# Altium PCB PCB2.PcbDoc
Units mm, origin at the board's own origin, x right, y up, seen from the top; angles counter-clockwise.
Board outline 82.55 x 50.29 mm, 2 copper layers (Top Layer, Bottom Layer); 31 components, 23 nets, 83 pads, 28 vias.
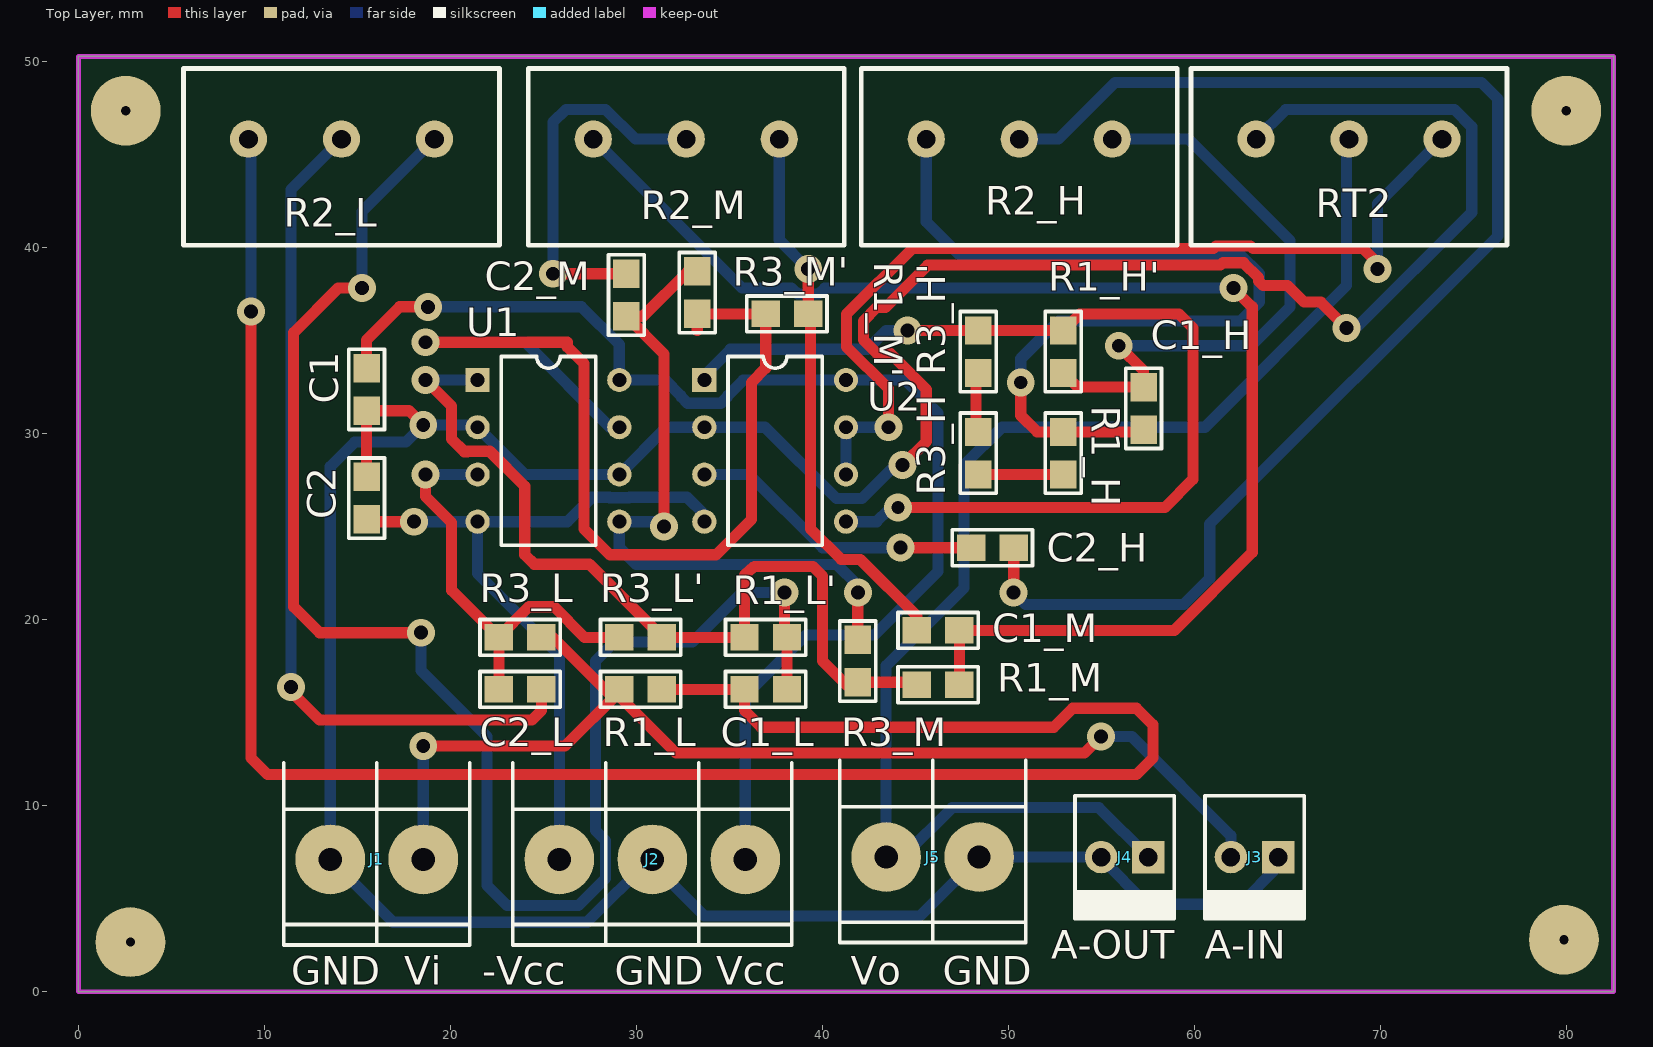
[diagram p0: Top Layer view]
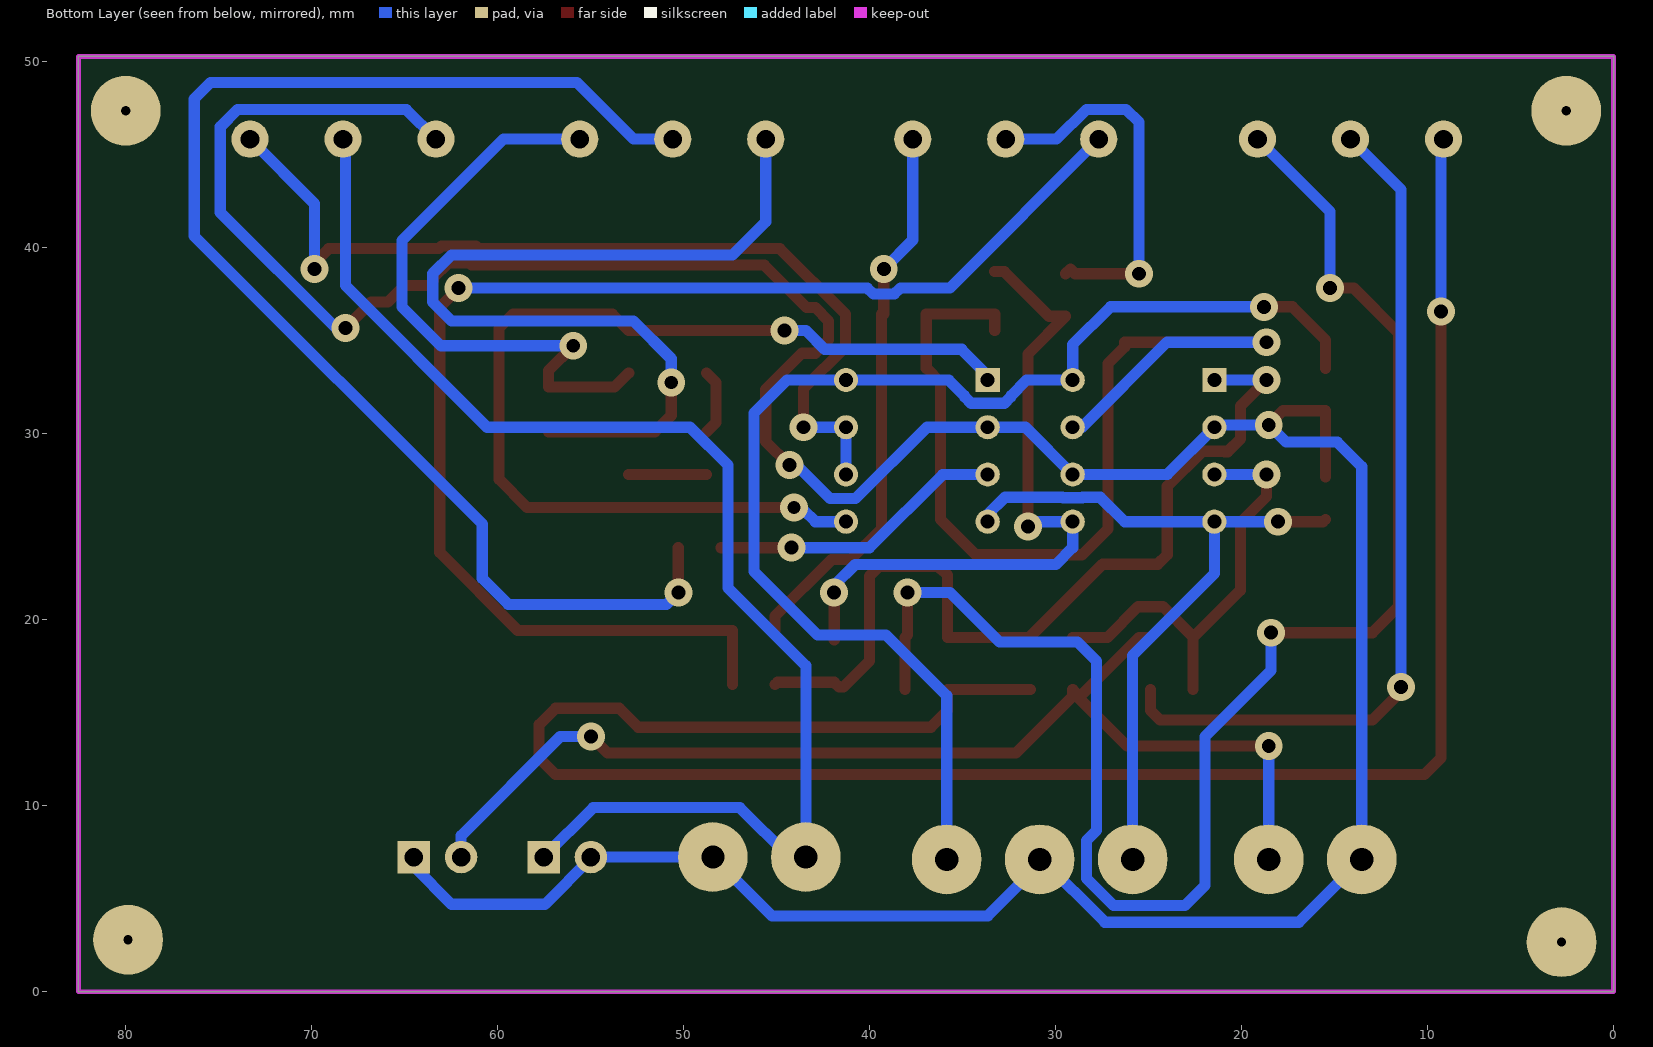
[diagram p1: Bottom Layer view, seen from below]
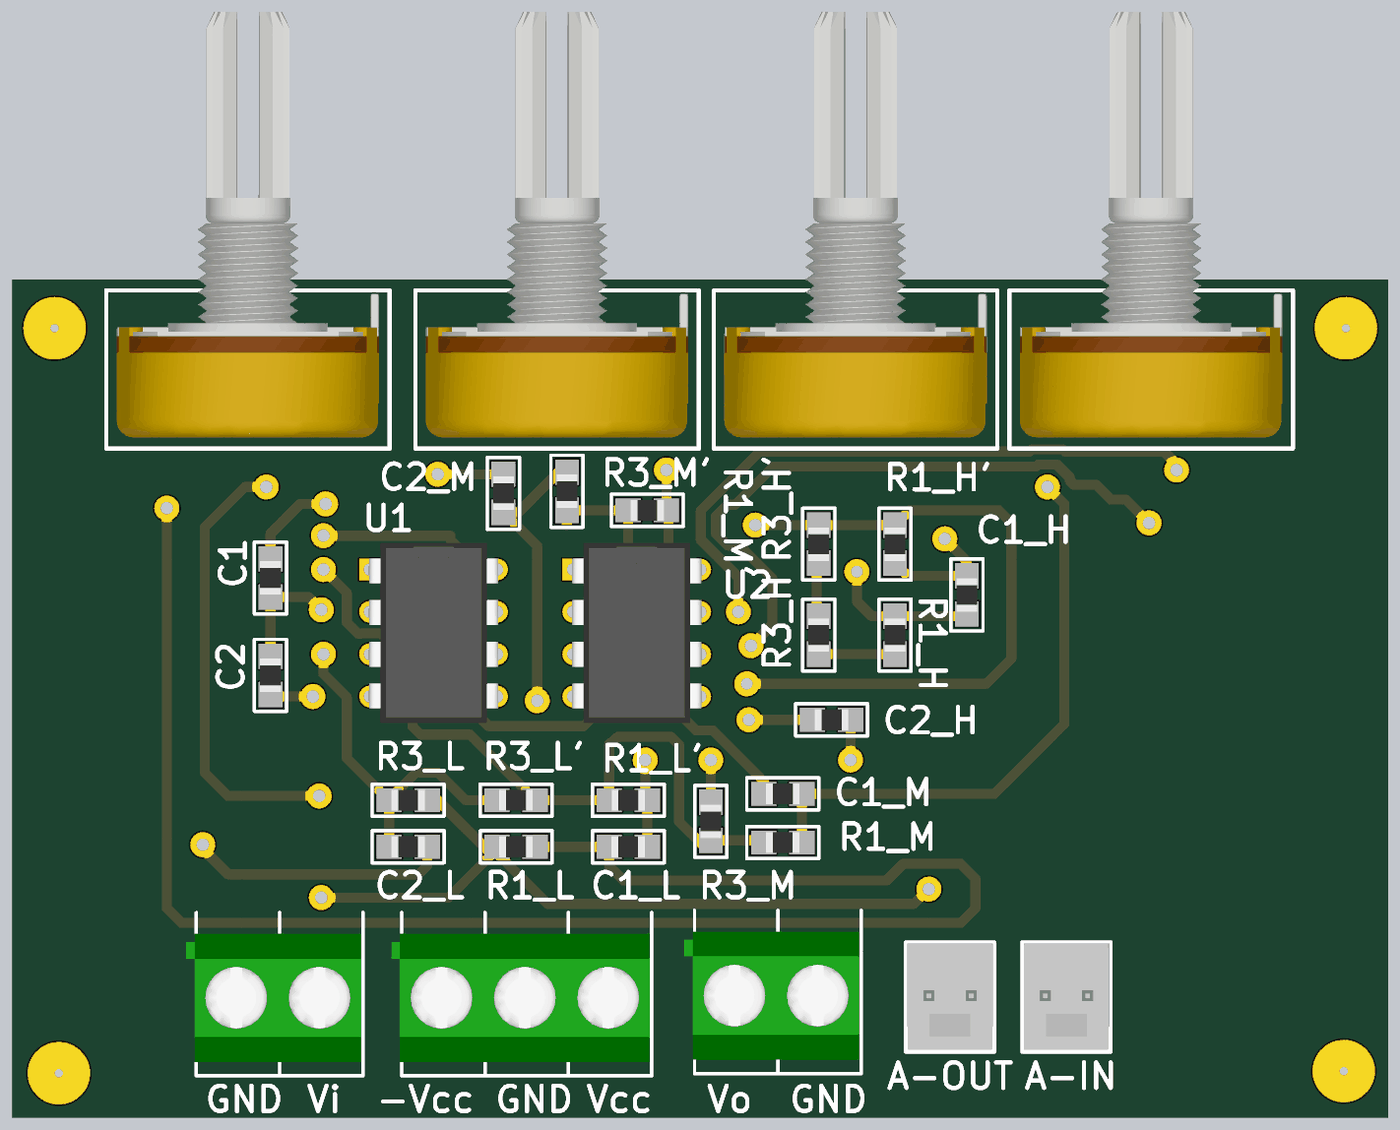
[diagram p2: 3D render of the assembled board from above, using the file's embedded part models]

## Layer stack, top to bottom
Top Solder: solder mask 0.0102, Solder Resist, Dk 3.5
Top Layer: signal copper 0.0356
Dielectric 1: dielectric 0.32, FR-4, Dk 4.8
Bottom Layer: signal copper 0.0356
Bottom Solder: solder mask 0.0102, Solder Resist, Dk 3.5

## Board outline
0,0 0,50.292 82.55,50.292 82.55,0

## Design rules (kind name [scope] priority, off if disabled: settings)
Clearance [All] p1: gap=0.3 ignorepadtopadclearanceinfootprint=FALSE
PolygonConnect [All] p1: connectstyle=Relief reliefconductorwidth=0.254 reliefentries=4 polygonreliefangle="90 Angle" airgapwidth=0.254
RoutingVias [All] p1: holewidth=0.7 width=2 viastyle="Through Hole" minholewidth=0.7 minwidth=2 maxholewidth=0.7 maxwidth=2
SolderMaskExpansion [All] p1: expansion=0.102
Width [All] p1: maxlimit=0.6 minlimit=0.6 preferedwidth=0.6
30 further rules are at their usual default settings.

## Components (designator, comment, footprint, x,y, rotation, side; value= is the part's Value field where it differs from the comment)
C1 "100n" 0805 15.494,32.385 r270 top
C1_H "56" 0805 57.277,31.369 r90 top
C1_L "68n" 0805 36.957,16.256 r0 top
C1_M "47n" 0805 46.228,19.431 r180 top
C2 "100n" 0805 15.494,26.543 r90 top
C2_H "5.6n" 0805 49.149,23.876 r180 top
C2_L "6.8n" 0805 23.749,16.256 r180 top
C2_M "4.7n" 0805 29.464,37.465 r270 top
J1 "IN" BORNERA2 16.042,7.112 r90 top
J2 "VCC" BORNERA3 30.861,7.112 r90 top
J3 "MOLEX2" MOLEX2 64.516,7.239 r180 top
J4 "MOLEX2" MOLEX2 57.531,7.239 r180 top
J5 "OUT" BORNERA2 45.934,7.239 r90 top
R1_H "100" 0805 52.959,28.956 r90 top
R1_H' "100" 0805 52.959,34.417 r90 top
R1_L "10k" 0805 30.226,16.256 r0 top
R1_L' "10k" 0805 36.957,19.05 r180 top
R1_M "1k" 0805 46.228,16.51 r0 top
R1_M' "1k" 0805 38.1,36.449 r180 top
R2_H "1k" POTENCIOMETRO 50.593,45.847 r180 top
R2_L "100k" POTENCIOMETRO 14.144,45.847 r180 top
R2_M "10k" POTENCIOMETRO 32.686,45.847 r180 top
R3_H "10k" 0805 48.387,28.956 r90 top
R3_H' "10k" 0805 48.387,34.417 r90 top
R3_L "1M" 0805 23.749,19.05 r180 top
R3_L' "1M" 0805 30.226,19.05 r0 top
R3_M "100k" 0805 41.91,17.78 r90 top
R3_M' "100k" 0805 33.274,37.592 r270 top
RT2 "100k" POTENCIOMETRO 68.326,45.847 r180 top
U1 "LM833" DIP8 21.463,32.893 r0 top
U2 "LM833" DIP8 33.655,32.893 r0 top

## Footprints (in the part's own frame and the unit in brackets; to place one, negate y for a bottom-side part, rotate by r counter-clockwise, add the part's x,y. Pads: shape width x height; smd on the part's side, far side on the other; paste and mask are expansions set on the pad)
0805 [mil] "Pasivo 0805"
  rect 60x56 smd: 1(-45,0) 2(45,0)
  silkscreen extent -85,-38 85,38, body extent -40,-25 39,25, height 15
BORNERA2 [mm] "Bornera con Tornillos 5mm separación"
  round 3.75 hole 1.25: 1(0,2.5) 2(0,-2.5)
  silkscreen extent -4.6,-5 5.2,5, body extent -3.76,-4.89 3.94,5.61, height 10
BORNERA3 [mm] "Bornera con Tornillos 5mm separación"
  round 3.75 hole 1.25: 1(0,5) 2(0,0) 3(0,-5)
  silkscreen extent -4.6,-7.5 5.2,7.5, body extent -3.76,-7.39 3.94,8.11, height 10.05
DIP8 [mm]
  rect 1.3x1.3 hole 0.75: 1(0,0)
  round 1.3 hole 0.75: 2(0,-2.54) 3(0,-5.08) 4(0,-7.62) 5(7.62,-7.62) 6(7.62,-5.08) 7(7.62,-2.54) 8(7.62,0)
  silkscreen extent 1.27,-8.89 6.35,1.27, body extent -0.06,-9.21 7.7,1.59, height 4.5
MOLEX2 [mm]
  rect 1.75x1.75 hole 1: 1(0,0)
  round 1.75 hole 1: 2(2.54,0)
  silkscreen extent -1.4,-3.3 3.94,3.3, body extent -1.27,-3.17 3.81,3.18, height 10.74
POTENCIOMETRO [mm]
  round 2 hole 1: 1(-5,0) 2(0,0) 3(5,0)
  silkscreen extent -8.5,-3.8 8.5,5.7, body extent -7.87,-20.53 7.87,5.03, height 20.12

## Part data
C1 C1_H C1_L C1_M C2 C2_H C2_L C2_M: library part CAP
J1 J5: library part "BORNERA 2"
J2: library part "BORNERA 3"
R1_H R1_H' R1_L R1_L' R1_M R1_M' R3_H R3_H' R3_L R3_L' R3_M R3_M': library part RES
R2_H R2_L R2_M RT2: library part POTENCIOMETRO
U1 U2: "Dual Audio Operational Amplifier"

## Free pads (board coordinates)
  round 3.75 hole 0.5: 2(2.54,47.371) 4(2.794,2.667) 5(80.01,47.371) 6(79.883,2.794)

## Via types
v1: diameter 1.5, hole 0.75, Top Layer to Bottom Layer, 26 vias
v2: diameter 1.5, hole 0.711, Top Layer to Bottom Layer, 1 vias
v3: diameter 1.5, hole 0.7, Top Layer to Bottom Layer, 1 vias

## Nets (pads, with @x,y where several pads share a name; then routed paths per layer and width w, separated by ;. In a path a pad name is that pad's centre, name@x,y a point inside that pad or via, vN(x,y) a via of type N, cw(c..) or ccw(c..) an arc to the next point about the centre after c; other vN are vias at no path point)
-VCC: C2.1 J2.1 U1.4 U2.4 | length 39.6
  Top Layer w0.6: C2.1 15.621,25.273 v1(18.034,25.273)
  Bottom Layer w0.6: v1(18.034,25.273) 21.209,25.273 21.336,25.4 U1.4 ; J2.1 25.861,18.081 21.463,22.479 U1.4 ; U2.4 33.655,25.654 32.721,26.588 29.626,26.588 29.601,26.563 28.565,26.563 28.54,26.588 27.604,26.588 26.289,25.273 U1.4
GND: C1.2 C2.2 J1.1 J2.2 J3.1 J4.2 J5.2 RT2.3 U1.2 U1.6 U2.2 | length 188.7
  Top Layer w0.6: C2.2 C1.2 17.78,31.242 v1(18.542,30.48) ; v1(44.323,28.321) 45.593,29.591 45.593,32.385 43.643,34.335 42.927,34.335 42.209,35.053 42.209,36.067 42.927,36.785 43.389,36.785 45.675,39.071 61.419,39.071 61.544,39.196 62.662,39.196 63.453,38.405 63.453,38.228 63.708,37.973 65.024,37.973 65.913,37.084 66.802,37.084 v1(68.199,35.687)
  Bottom Layer w0.6: v1(44.323,28.321) 43.942,28.321 42.144,26.523 40.757,26.523 36.927,30.353 U2.2 31.623,30.353 U1.6 24.003,27.813 U1.2 21.336,30.48 v1(18.542,30.48) 17.62,29.558 14.859,29.558 13.542,28.241 J1.1 16.917,3.737 27.359,3.737 30.734,7.112 J2.2 30.861,6.858 33.655,4.064 45.259,4.064 J5.2 J4.2 54.991,7.18 57.472,4.699 62.484,4.699 64.516,6.731 J3.1 ; RT2.3 64.926,47.447 73.989,47.447 74.926,46.51 74.926,41.906 68.707,35.687 v1(68.199,35.687)
NetC1_H_1: C1_H.1 R1_H.2 R2_H.3 | length 49.1
  Top Layer w0.6: v2(50.673,32.766) 50.673,30.988 51.562,30.099 R1_H.2 C1_H.1@57.277,30.099
  Bottom Layer w0.6: R2_H.3 45.593,41.402 47.371,39.624 62.484,39.624 63.5,38.608 63.5,37.084 62.484,36.068 52.705,36.068 50.673,34.036 v2(50.673,32.766)
NetC1_H_2: C1_H.2 R1_H'.1 R2_H.1 | length 32.9
  Top Layer w0.6: R1_H'.1 53.721,32.512 C1_H.2 57.277,33.401 v1(55.944,34.734)
  Bottom Layer w0.6: R2_H.1 59.69,45.847 65.151,40.386 65.151,36.83 63.055,34.734 v1(55.944,34.734)
NetC1_L_1: C1_L.1 R1_L.2 R2_L.3 | length 113.1
  Top Layer w0.6: v1(9.271,36.576) 9.271,12.573 10.16,11.684 56.896,11.684 57.785,12.573 57.785,14.351 56.896,15.24 53.467,15.24 52.451,14.224 36.703,14.224 35.814,15.113 C1_L.1 R1_L.2
  Bottom Layer w0.6: R2_L.3 9.271,45.72 v1(9.271,36.576)
NetC1_L_2: C1_L.2 R1_L'.1 R2_L.1 | length 87.8
  Top Layer w0.6: v1(15.24,37.846) 13.97,37.846 11.557,35.433 11.557,20.701 12.954,19.304 v1(18.415,19.304) ; v1(37.973,21.463) 37.973,19.177 R1_L'.1 C1_L.2
  Bottom Layer w0.6: v1(15.24,37.846) 15.24,41.943 R2_L.1 ; v1(18.415,19.304) 18.415,17.272 21.971,13.716 21.971,5.715 23.049,4.637 26.886,4.637 28.336,6.087 28.336,8.137 27.813,8.66 27.813,17.78 28.829,18.796 33.02,18.796 35.687,21.463 v1(37.973,21.463)
NetC1_M_1: C1_M.1 R1_M.2 R2_M.3 | length 72.9
  Top Layer w0.6: R1_M.2 C1_M.1 58.928,19.431 63.119,23.622 63.119,36.83 v1@62.23,37.719
  Bottom Layer w0.6: R2_M.3 35.687,37.846 38.35,37.846 38.684,37.512 39.802,37.512 40.136,37.846 v1(62.103,37.846)
NetC1_M_2: C1_M.2 R1_M'.1 R2_M.1 | length 30
  Top Layer w0.6: R1_M'.1 v1(39.243,38.862) ; R1_M'.1@39.37,36.449 39.37,24.892 41.021,23.241 42.041,23.241 45.085,20.197 C1_M.2
  Bottom Layer w0.6: R2_M.1 37.686,40.419 v1(39.243,38.862)
NetC2_H_1: C2_H.1 R2_H.2 | length 73.4
  Top Layer w0.6: v1(50.292,21.463) C2_H.1
  Bottom Layer w0.6: v1(50.292,21.463) 50.927,20.828 59.436,20.828 60.833,22.225 60.833,25.146 76.327,40.64 76.327,48.006 75.438,48.895 55.753,48.895 52.705,45.847 R2_H.2
NetC2_H_2: C2_H.2 U2.3 | length 15.6
  Top Layer w0.6: v1(44.196,23.876) C2_H.2
  Bottom Layer w0.6: U2.3 36.068,27.813 40.005,23.876 v1@43.815,23.876
NetC2_L_1: C2_L.1 R2_L.2 | length 45.9
  Top Layer w0.6: v1@11.557,16.002 12.954,14.605 24.384,14.605 24.892,15.113 C2_L.1
  Bottom Layer w0.6: v1(11.43,16.383) 11.43,43.133 R2_L.2
NetC2_L_2: C2_L.2 R3_L'.1 R3_L.2 U1.3 | length 23.8
  Top Layer w0.6: v1(18.669,27.813) 18.669,26.624 20.066,25.227 20.066,21.59 R3_L.2 ; C2_L.2 R3_L.2 ; R3_L'.1 27.214,19.05 25.563,20.701 24.221,20.701 22.606,19.086 R3_L.2
  Bottom Layer w0.6: v1(18.669,27.813) U1.3
NetC2_M_1: C2_M.1 R2_M.2 | length 20.4
  Top Layer w0.6: v1(25.527,38.608) 28.956,38.608 29.21,38.862 C2_M.1
  Bottom Layer w0.6: v1(25.527,38.608) 25.527,46.761 26.213,47.447 28.349,47.447 29.949,45.847 R2_M.2
NetC2_M_2: C2_M.2 R3_M'.1 R3_M.2 U1.5 | length 37.2
  Top Layer w0.6: v1(31.496,25.019) 31.496,34.29 C2_M.2 30.353,36.322 32.766,38.735 R3_M'.1 ; R3_M.2 v1(41.91,21.463)
  Bottom Layer w0.6: v1@31.369,25.273 U1.5 29.083,23.876 29.983,22.976 40.778,22.976 41.91,21.844 v1(41.91,21.463)
NetR3_H'_1: R3_H'.1 R3_H.2 | length 3.6
  Top Layer w0.6: R3_H.2@48.768,30.099 48.26,30.607 48.26,32.766 R3_H'.1@48.768,33.274
NetRT2_1: RT2.1 U2.6 U2.7 | length 51.5
  Top Layer w0.6: v1(43.561,30.353) 43.561,32.428 41.309,34.68 41.309,36.44 44.84,39.971 61.046,39.971 61.171,40.096 63.035,40.096 63.16,39.971 69.088,39.971 70.197,38.862 v1(69.85,38.862)
  Bottom Layer w0.6: U2.6 U2.7 v1(43.561,30.353) ; v1(69.85,38.862) 69.85,42.371 RT2.1
V1: R1_L'.2 R1_M.1 R3_L'.2 R3_M.1 U1.1 | length 47.2
  Top Layer w0.6: v1(18.669,32.893) 20.066,31.496 20.066,29.718 20.746,29.038 20.92,29.038 20.945,29.063 22.118,29.063 24.003,27.178 24.003,23.495 24.511,22.987 27.468,22.987 31.369,19.086 R3_L'.2 R1_L'.2 35.814,22.415 36.347,22.86 39.497,22.86 40.005,22.352 40.005,17.78 41.402,16.383 41.656,16.383 R3_M.1 44.958,16.637 R1_M.1
  Bottom Layer w0.6: v1(18.669,32.893) U1.1
V2: R1_M'.2 R3_M'.2 U1.7 | length 56.7
  Top Layer w0.6: v1(18.669,34.925) 26.289,34.925 26.289,34.671 27.178,33.782 27.178,24.892 28.575,23.495 34.29,23.495 36.195,25.4 36.195,32.766 36.957,33.528 R1_M'.2 R3_M'.2 33.274,35.56
  Bottom Layer w0.6: v1(18.669,34.925) 24.003,34.925 28.575,30.353 U1.7
V3: R1_H.1 R3_H.1 | length 4.2
  Top Layer w0.6: R3_H.1@48.768,27.813 R1_H.1
V4: R1_H'.2 R3_H'.2 U2.1 U2.5 | length 55.4
  Top Layer w0.6: v3(44.069,26.035) 58.42,26.035 59.944,27.559 59.944,35.687 59.182,36.449 53.848,36.449 R1_H'.2 R3_H'.2 v1(44.577,35.56)
  Bottom Layer w0.6: U2.1 33.655,33.147 35.052,34.544 42.418,34.544 43.434,35.56 v1(44.577,35.56) ; U2.5 42.926,25.273 v3@43.561,25.908
VCC: C1.1 J2.3 U1.8 U2.8 | length 68
  Top Layer w0.6: C1.1 15.494,35.052 17.272,36.83 v1(18.796,36.83)
  Bottom Layer w0.6: v1(18.796,36.83) 27.051,36.83 29.083,34.798 U1.8 31.556,32.893 32.405,32.044 32.405,31.994 32.756,31.643 34.554,31.643 34.905,31.994 34.905,32.044 35.754,32.893 U2.8 44.45,32.893 46.228,31.115 46.228,22.606 42.799,19.177 39.116,19.177 35.861,15.922 J2.3
Vin: J1.2 J3.2 R1_L.1 R3_L.1 | length 61.8
  Top Layer w0.6: v1(18.542,13.208) 26.162,13.208 R1_L.1@29.083,16.129 ; R3_L.1 25.527,19.05 28.702,15.875 R1_L.1 R1_L.1@29.083,16.129 ; v1(54.991,13.716) 54.102,12.827 32.131,12.827 29.083,15.875 R1_L.1@29.083,16.129
  Bottom Layer w0.6: J1.2 v1(18.542,13.208) ; v1(54.991,13.716) 56.642,13.716 61.976,8.382 J3.2
Vout: J4.1 J5.1 RT2.2 | length 70.6
  Bottom Layer w0.6: J4.1 54.864,9.906 46.99,9.906 44.323,7.239 J5.1 43.434,17.526 47.625,21.717 47.625,28.321 49.657,30.353 60.579,30.353 68.199,37.973 RT2.2@68.199,44.895
copper on no net: | length 0.3
  Bottom Layer w0.6: 68.326,45.847 68.58,45.847

## Keep-outs
Keep-Out Layer:
  the board outline again, w0.254

## Silkscreen, mask and mechanical layers (free items; w line width, h text height)
Top Overlay:
  text "A-OUT" at 52.324,1.778 h1.52
  text "A-IN" at 60.579,1.778 h1.52
  text "GND" at 11.43,0.381 h1.52
  text "Vi" at 17.526,0.381 h1.52
  text "-Vcc" at 21.717,0.381 h1.52
  text "GND" at 28.829,0.381 h1.52
  text "Vcc" at 34.29,0.381 h1.52
  text "Vo" at 41.529,0.381 h1.52
  text "GND" at 46.482,0.381 h1.52